# Altium PCB PCB1.PcbDoc
Units mm, origin at the board's own origin, x right, y up, seen from the top; angles counter-clockwise.
Board outline 125 x 72.5 mm, 2 copper layers (Top Layer, Bottom Layer), stack 1.571 mm thick; 55 components, 66 nets, 239 pads, 39 vias.
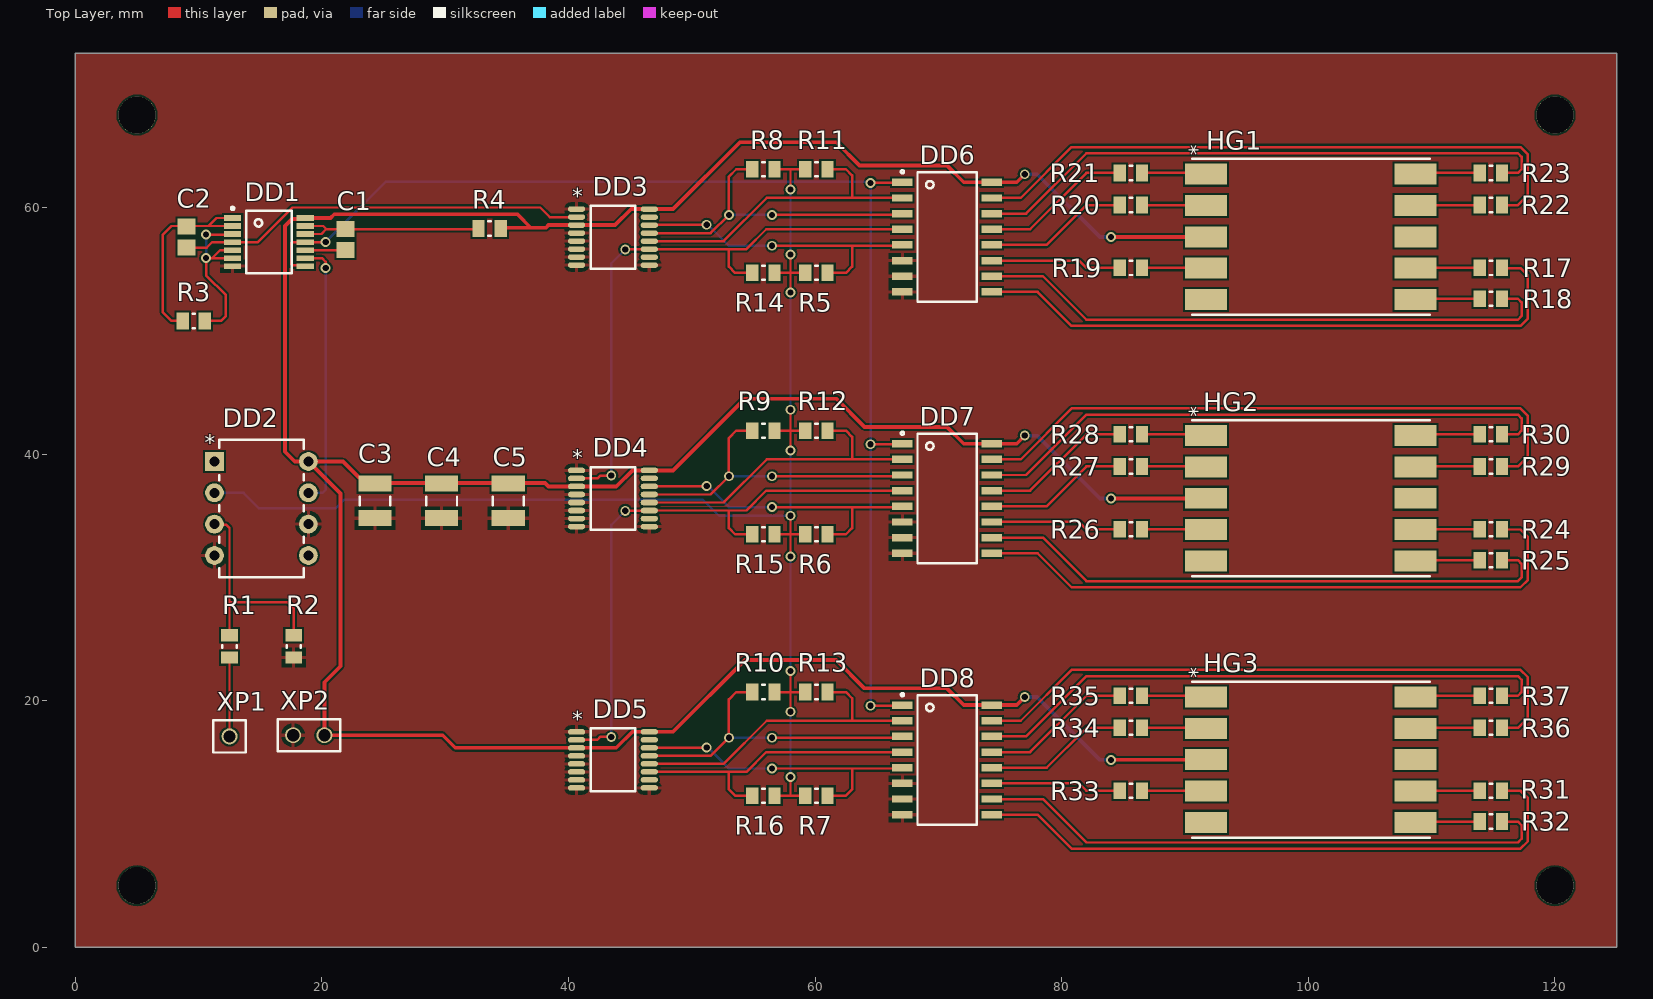
[diagram p0: Top Layer view]
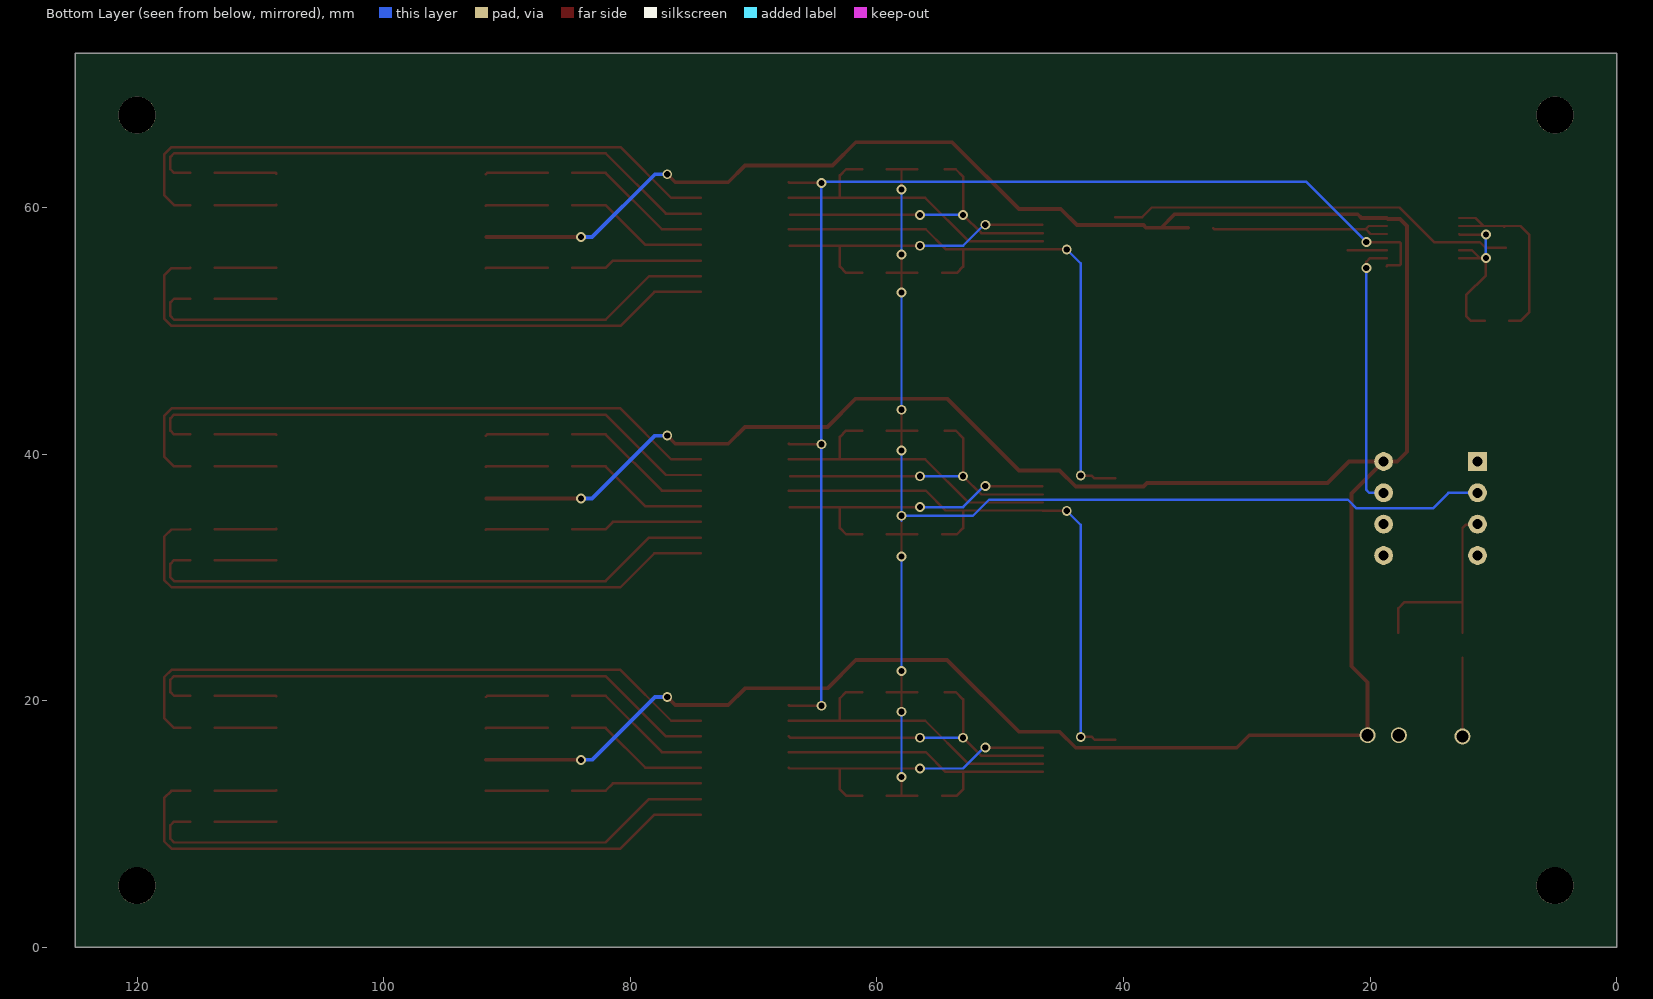
[diagram p1: Bottom Layer view, seen from below]
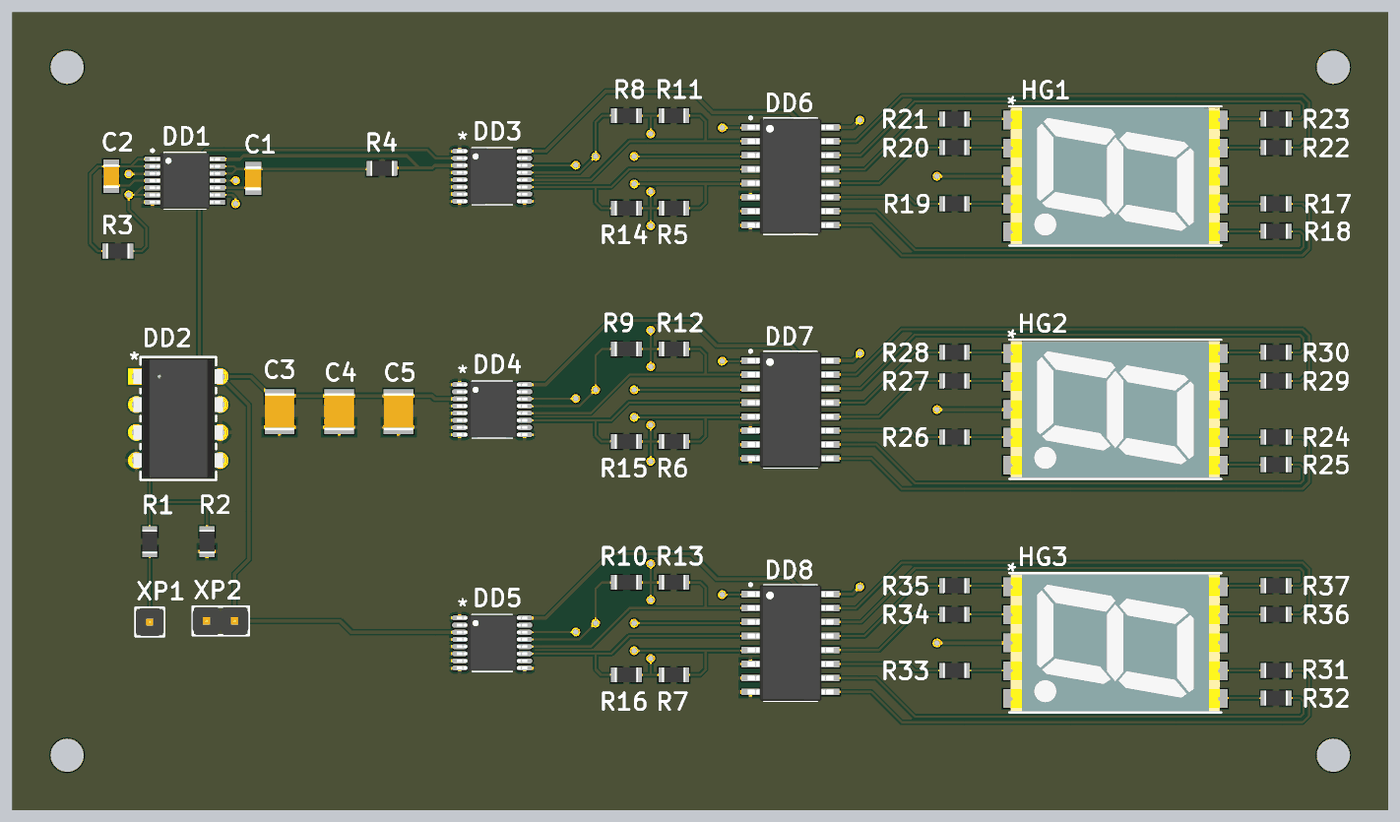
[diagram p2: 3D render of the assembled board from above, using the file's embedded part models]

## Layer stack, top to bottom
Top Solder: solder mask 0.0102, Solder Resist, Dk 3.5
Top Layer: signal copper 0.0356
Dielectric 1: dielectric 1.5, FR-4, Dk 4.8
Bottom Layer: signal copper 0.0356
Bottom Solder: solder mask 0.0102, Solder Resist, Dk 3.5

## Board outline
0,0 125,0 125,72.5 0,72.5

## Design rules (kind name [scope] priority, off if disabled: settings)
Clearance [All] p1: gap=0.15 ignorepadtopadclearanceinfootprint=FALSE
ComponentClearance [All] p1: gap=0.5 collisioncheckmode=3 verticalgap=0 showdistances=FALSE
HoleSize [All] p1: absolutevalues=TRUE maxlimit=3 minlimit=0.5 maxpercent=80.000 minpercent=20.000
MinimumSolderMaskSliver [All] p1: minsoldermaskwidth=0.1
PolygonConnect [All] p1: connectstyle=Relief reliefconductorwidth=0.3 reliefentries=4 polygonreliefangle="90 Angle" airgapwidth=0.3
RoutingVias [All] p1: holewidth=0.5 width=0.8 viastyle="Through Hole" minholewidth=0.4 minwidth=0.6 maxholewidth=0.6 maxwidth=1
SilkToSilkClearance [All] p1: silktosilkclearance=0.1
SilkToSolderMaskClearance [IsPad] p1: minsilkscreentomaskgap=0.1 clearancetoexposedcopper=TRUE
SolderMaskExpansion [All] p1: expansion=0.102 istentingtop=FALSE
Width Width_VCC_GND [InNetClass('VCC/GND')] p1: maxlimit=0.3 minlimit=0.3 preferedwidth=0.3
Width [All] p2: maxlimit=0.25 minlimit=0.15 preferedwidth=0.2
25 further rules are at their usual default settings.

## Classes and differential pairs
net class VCC/GND: GND NetC3_2

## Components (designator, comment, footprint, x,y, rotation, side; value= is the part's Value field where it differs from the comment)
C1 "C-0805 50 В 1,2 нФ 10% X7R KEMET" CAPC2012X09N 21.9,57.4 r90 top value="1,2 нФ"
C2 "C-0805 50 В 1,8 нФ 10% X7R Kemet" CAPC2012X09N 9,57.6 r270 top value="1,8 нФ"
C3 "C-1210 16 В 100 мкФ 20% X5R KEMET" CAPC3225X27N 24.3,36.2 r90 top value="100 мкФ"
C4 "C-1210 16 В 100 мкФ 20% X5R KEMET" CAPC3225X27N 29.7,36.2 r90 top value="100 мкФ"
C5 "C-1210 16 В 100 мкФ 20% X5R KEMET" CAPC3225X27N 35.1,36.2 r90 top value="100 мкФ"
DD1 "CD4001BPWR Texas Instruments" TSOP65P640X120-14N 15.7,57.2 r0 top
DD2 "LM311N STMicroelectronics" DIP-8_STM 11.28,39.4 r0 top
DD3 "TC-5971" TC5971 43.6,57.6 r0 top
DD4 "TC-5971" TC5971 43.6,36.4 r0 top
DD5 "TC-5971" TC5971 43.6,15.2 r0 top
DD6 "CD4511BNSR Texas Instruments" SOIC127P780X200-16N 70.7,57.6 r0 top
DD7 "CD4511BNSR Texas Instruments" SOIC127P780X200-16N 70.7,36.4 r0 top
DD8 "CD4511BNSR Texas Instruments" SOIC127P780X200-16N 70.7,15.2 r0 top
HG1 "ACSC56-41QBWA/D-F01 Kingbright" ACSX56-41 91.7,62.7 r270 top
HG2 "ACSC56-41QBWA/D-F01 Kingbright" ACSX56-41 91.7,41.5 r270 top
HG3 "ACSC56-41QBWA/D-F01 Kingbright" ACSX56-41 91.7,20.3 r270 top
R1 "0,125 Вт 10 кОм 5% Yageo" RESC2012X05N 12.5,23.5 r90 top value="10 кОм"
R2 "0,125 Вт 100 кОм 5% Yageo" RESC2012X05N 17.7,23.5 r90 top value="100 кОм"
R3 "0,125 Вт 360 кОм 5% Yageo" RESC2012X05N 8.7,50.8 r0 top value="360 кОм"
R4 "0,125 Вт 360 кОм 5% Yageo" RESC2012X05N 32.7,58.3 r0 top value="360 кОм"
R5 "0,125 Вт 36 кОм 5% Yageo" RESC2012X05N 59.2,54.7 r0 top value="36 кОм"
R6 "0,125 Вт 360 кОм 5% Yageo" RESC2012X05N 59.2,33.5 r0 top value="360 кОм"
R7 "0,125 Вт 3,6 МОм 5% Yageo" RESC2012X05N 59.2,12.3 r0 top value="3,6 МОм"
R8 "0,125 Вт 18 кОм 5% Yageo" RESC2012X05N 56.7,63.1 r180 top value="18 кОм"
R9 "0,125 Вт 180 кОм 5% Yageo" RESC2012X05N 56.7,41.9 r180 top value="180 кОм"
R10 "0,125 Вт 1,8 МОм 5% Yageo" RESC2012X05N 56.7,20.7 r180 top value="1,8 МОм"
R11 "0,125 Вт 9,1 кОм 5% Yageo" RESC2012X05N 59.2,63.1 r0 top value="9,1 кОм"
R12 "0,125 Вт 91 кОм 5% Yageo" RESC2012X05N 59.2,41.9 r0 top value="91 кОм"
R13 "0,125 Вт 910 кОм 5% Yageo" RESC2012X05N 59.2,20.7 r0 top value="910 кОм"
R14 "0,125 Вт 4,7 кОм 5% Yageo" RESC2012X05N 56.7,54.7 r180 top value="4,7 кОм"
R15 "0,125 Вт 47 кОм 5% Yageo" RESC2012X05N 56.7,33.5 r180 top value="47 кОм"
R16 "0,125 Вт 470 кОм 5% Yageo" RESC2012X05N 56.7,12.3 r180 top value="470 кОм"
R17 "0,125 Вт 470 кОм 5% Yageo" RESC2012X05N 115.7,55.1 r180 top value="470 кОм"
R18 "0,125 Вт 470 кОм 5% Yageo" RESC2012X05N 115.7,52.6 r180 top value="470 кОм"
R19 "0,125 Вт 470 кОм 5% Yageo" RESC2012X05N 84.7,55.1 r0 top value="470 кОм"
R20 "0,125 Вт 470 кОм 5% Yageo" RESC2012X05N 84.7,60.2 r0 top value="470 кОм"
R21 "0,125 Вт 470 кОм 5% Yageo" RESC2012X05N 84.7,62.8 r0 top value="470 кОм"
R22 "0,125 Вт 470 кОм 5% Yageo" RESC2012X05N 115.7,60.2 r180 top value="470 кОм"
R23 "0,125 Вт 470 кОм 5% Yageo" RESC2012X05N 115.7,62.8 r180 top value="470 кОм"
R24 "0,125 Вт 470 кОм 5% Yageo" RESC2012X05N 115.7,33.9 r180 top value="470 кОм"
R25 "0,125 Вт 470 кОм 5% Yageo" RESC2012X05N 115.7,31.4 r180 top value="470 кОм"
R26 "0,125 Вт 470 кОм 5% Yageo" RESC2012X05N 84.7,33.9 r0 top value="470 кОм"
R27 "0,125 Вт 470 кОм 5% Yageo" RESC2012X05N 84.7,39 r0 top value="470 кОм"
R28 "0,125 Вт 470 кОм 5% Yageo" RESC2012X05N 84.7,41.6 r0 top value="470 кОм"
R29 "0,125 Вт 470 кОм 5% Yageo" RESC2012X05N 115.7,39 r180 top value="470 кОм"
R30 "0,125 Вт 470 кОм 5% Yageo" RESC2012X05N 115.7,41.6 r180 top value="470 кОм"
R31 "0,125 Вт 470 кОм 5% Yageo" RESC2012X05N 115.7,12.7 r180 top value="470 кОм"
R32 "0,125 Вт 470 кОм 5% Yageo" RESC2012X05N 115.7,10.2 r180 top value="470 кОм"
R33 "0,125 Вт 470 кОм 5% Yageo" RESC2012X05N 84.7,12.7 r0 top value="470 кОм"
R34 "0,125 Вт 470 кОм 5% Yageo" RESC2012X05N 84.7,17.8 r0 top value="470 кОм"
R35 "0,125 Вт 470 кОм 5% Yageo" RESC2012X05N 84.7,20.4 r0 top value="470 кОм"
R36 "0,125 Вт 470 кОм 5% Yageo" RESC2012X05N 115.7,17.8 r180 top value="470 кОм"
R37 "0,125 Вт 470 кОм 5% Yageo" RESC2012X05N 115.7,20.4 r180 top value="470 кОм"
XP1 "61300111121 Würth Elektronik" PLS-1 12.5,17.1 r0 top
XP2 "61300211121 Würth Elektronik" PLS-2 20.2,17.2 r180 top

## Footprints (in the part's own frame and the unit in brackets; to place one, negate y for a bottom-side part, rotate by r counter-clockwise, add the part's x,y. Pads: shape width x height; smd on the part's side, far side on the other; paste and mask are expansions set on the pad)
ACSX56-41 [mm] "DISPLAY 7SEG 0.56\" SGL BLU 10SMD"
  rect 1.7x3.4 smd: 1(0,0) 2(2.54,0) 3(5.08,0) 4(7.62,0) 5(10.16,0) 6(10.16,17) 7(7.62,17) 8(5.08,17) 9(2.54,17) 10(0,17)
  silkscreen extent -1.25,-1.13 11.41,18.13, body extent -1.12,-1 11.28,18, height 3.75
CAPC2012X09N [mm] "Chip Capacitor, 2-Leads, Body 2.00x1.25mm, IPC Medium Density"
  rect 1.3x1.45 smd: 1(-0.85,0) 2(0.85,0)
  body extent -1.1,-0.72 1.1,0.72, height 0.88
CAPC3225X27N [mm] "Chip Capacitor, 2-Leads, Body 3.20x2.50mm, IPC Medium Density"
  rect 1.3x2.7 smd: 1(-1.4,0) 2(1.4,0)
  silkscreen extent -0.35,-1.25 0.35,1.25, body extent -1.7,-1.35 1.7,1.35, height 2.7
DIP-8_STM [mil]
  rect 60x60 hole 31.5 mask+0: 1(0,0)
  round 60 hole 31.5 mask+0: 2(0,-100) 3(0,-200) 4(0,-300) 5(300,-300) 6(300,-200) 7(300,-100) 8(300,0)
  silkscreen extent 15,-370 285,70, body extent -10,-365 310,65, height 205
PLS-1 [mm] "CONN HEADER VERT 1POS"
  round 1.3 hole 1: 1(0,0)
  silkscreen extent -1.3,-1.3 1.3,1.3, body extent -1.27,-1.27 1.27,1.27, height 8.54
PLS-2 [mm] "CONN HEADER VERT 2POS 2.54MM"
  round 1.3 hole 1: 1(0,0) 2(2.54,0)
  silkscreen extent -1.3,-1.3 3.8,1.3, body extent -1.27,-1.27 3.81,1.27, height 8.54
RESC2012X05N [mm] "Chip Resistor, 2-Leads, Body 2.00x1.25mm, IPC Medium Density"
  rect 1x1.35 smd: 1(0,0) 2(1.8,0)
  silkscreen extent 0.8,-0.58 1,0.58, body extent -0.15,-0.67 1.95,0.67, height 0.5
SOIC127P780X200-16N [mm] "SOIC, 16-Leads, Body 10.20x5.30mm, Pitch 1.27mm, IPC Medium Density"
  rect 1.65x0.6 smd: 1(-3.625,4.445) 2(-3.625,3.175) 3(-3.625,1.905) 4(-3.625,0.635) 5(-3.625,-0.635) 6(-3.625,-1.905) 7(-3.625,-3.175) 8(-3.625,-4.445) 9(3.625,-4.445) 10(3.625,-3.175) 11(3.625,-1.905) 12(3.625,-0.635) 13(3.625,0.635) 14(3.625,1.905) 15(3.625,3.175) 16(3.625,4.445)
  silkscreen extent -3.75,-5.25 2.4,5.42, body extent -3.9,-5.25 3.9,5.25, height 2
TC5971 [mm]
  oval 1.4x0.45 smd: 1(-2.95,2.275) 2(-2.95,1.625) 3(-2.95,0.975) 4(-2.95,0.325) 5(-2.95,-0.325) 6(-2.95,-0.975) 7(-2.95,-1.625) 8(-2.95,-2.275) 9(2.95,-2.275) 10(2.95,-1.625) 11(2.95,-0.975) 12(2.95,-0.325) 13(2.95,0.325) 14(2.95,0.975) 15(2.95,1.625) 16(2.95,2.275)
  silkscreen extent -1.8,-2.55 1.8,2.55, body extent -3.2,-2.55 3.2,2.55, height 1.2
TSOP65P640X120-14N [mm] "TSOP, 14-Leads, Body 5.00x4.40mm, Pitch 0.65mm, IPC Medium Density"
  rect 1.4x0.45 smd: 1(-2.95,1.95) 2(-2.95,1.3) 3(-2.95,0.65) 4(-2.95,0) 5(-2.95,-0.65) 6(-2.95,-1.3) 7(-2.95,-1.95) 8(2.95,-1.95) 9(2.95,-1.3) 10(2.95,-0.65) 11(2.95,0) 12(2.95,0.65) 13(2.95,1.3) 14(2.95,1.95)
  silkscreen extent -3.07,-2.55 1.85,2.85, body extent -3.2,-2.55 3.2,2.55, height 1.2

## Part data
C1: library part C0805C122K5RAC7800, "CAP CER 1200PF 50V X7R 0805", Manufacturer=KEMET, Package=C-0805, Temp_Coef=X7R, Tolerance=10%, Voltage="50 В"
C2: library part C0805C182K5RAC7800, "CAP CER 1800PF 50V X7R 0805", Manufacturer=KEMET, Package=C-0805, Temp_Coef=X7R, Tolerance=10%, Voltage="50 В"
C3 C4 C5: library part C1210C107M4PAC7800, "CAP CER 100UF 16V X5R 1210", Manufacturer=KEMET, Package=C-1210, Temp_Coef=X5R, Tolerance=20%, Voltage="16 В"
DD1: library part CD4001BPWR, "IC GATE NOR 4CH 2-INP 14TSSOP", Manufacturer="Texas Instruments", Name=CD4001BPWR
DD2: library part LM311N, "IC VOLTAGE COMPARATOR 8-DIP", Manufacturer=STMicroelectronics, Name=LM311N
DD3 DD4 DD5: "IC COUNTER BINARY/DECADE", Name=TC-5971
DD6 DD7 DD8: library part CD4511BNSR, "IC DRVR 7 SEGMENT 16SO", Manufacturer="Texas Instruments", Name=CD4511BNSR
HG1 HG2 HG3: library part ACSC56-41QBWA/D-F01, "DISPLAY 7SEG 0.56\" SGL BLU 10SMD", Manufacturer=Kingbright, Name=ACSC56-41QBWA/D-F01
R1: library part RC0805JR-0710KL, "RES 10K OHM 5% 1/8W 0805", Manufacturer=YAGEO, Packages=R-0805, Power="0,125 Вт", Tolerance=5%
R2: library part RC0805JR-07100KL, "RES 100K OHM 5% 1/8W 0805", Manufacturer=YAGEO, Packages=R-0805, Power="0,125 Вт", Tolerance=5%
R3 R4 R6: library part RC0805JR-07360KL, "RES 360K OHM 5% 1/8W 0805", Manufacturer=YAGEO, Packages=R-0805, Power="0,125 Вт", Tolerance=5%
R5: library part RC0805JR-0736KL, "RES 36K OHM 5% 1/8W 0805", Manufacturer=YAGEO, Packages=R-0805, Power="0,125 Вт", Tolerance=5%
R7: library part RC0805JR-073M6L, "RES 3.6M OHM 5% 1/8W 0805", Manufacturer=YAGEO, Packages=R-0805, Power="0,125 Вт", Tolerance=5%
R8: library part RC0805JR-0718KL, "RES 18K OHM 5% 1/8W 0805", Manufacturer=YAGEO, Packages=R-0805, Power="0,125 Вт", Tolerance=5%
R9: library part RC0805JR-07180KL, "RES 180K OHM 5% 1/8W 0805", Manufacturer=YAGEO, Packages=R-0805, Power="0,125 Вт", Tolerance=5%
R10: library part RC0805JR-071M8L, "RES 1.8M OHM 5% 1/8W 0805", Manufacturer=YAGEO, Packages=R-0805, Power="0,125 Вт", Tolerance=5%
R11: library part RC0805JR-079K1L, "RES 9.1K OHM 5% 1/8W 0805", Manufacturer=YAGEO, Packages=R-0805, Power="0,125 Вт", Tolerance=5%
R12: library part RC0805JR-0791KL, "RES 91K OHM 5% 1/8W 0805", Manufacturer=YAGEO, Packages=R-0805, Power="0,125 Вт", Tolerance=5%
R13: library part RC0805JR-07910KL, "RES 910K OHM 5% 1/8W 0805", Manufacturer=YAGEO, Packages=R-0805, Power="0,125 Вт", Tolerance=5%
R14: library part RC0805JR-074K7L, "RES 4.7K OHM 5% 1/8W 0805", Manufacturer=YAGEO, Packages=R-0805, Power="0,125 Вт", Tolerance=5%
R15: library part RC0805JR-0747KL, "RES 47K OHM 5% 1/8W 0805", Manufacturer=YAGEO, Packages=R-0805, Power="0,125 Вт", Tolerance=5%
R16 R17 R18 R19 R20 R21 R22 R23 R24 R25 R26 R27 R28 R29 R30 R31 R32 R33 R34 R35 R36 R37: library part RC0805JR-07470KL, "RES 470K OHM 5% 1/8W 0805", Manufacturer=YAGEO, Packages=R-0805, Power="0,125 Вт", Tolerance=5%
XP1: library part 61300111121, "CONN HEADER VERT 1POS", Manufacturer="Würth Elektronik", Name=61300111121
XP2: library part 61300211121, "CONN HEADER VERT 2POS 2.54MM", Manufacturer="Würth Elektronik", Name=61300211121

## Free pads (board coordinates)
  round 3 hole 3: GND(5,5) GND(5,67.5) GND(120,5) GND(120,67.5)

## Via types
v1: diameter 0.8, hole 0.5, Top Layer to Bottom Layer, 39 vias

## Nets (pads, with @x,y where several pads share a name; then routed paths per layer and width w, separated by ;. In a path a pad name is that pad's centre, name@x,y a point inside that pad or via, vN(x,y) a via of type N, cw(c..) or ccw(c..) an arc to the next point about the centre after c; other vN are vias at no path point)
GND: C3.1 C4.1 C5.1 DD1.7 DD2.4 DD2.6 DD3.1 DD3.4 DD3.5 DD3.6 DD3.7 DD3.8 DD3.9 DD4.1 DD4.4 DD4.5 DD4.6 DD4.7 DD4.8 DD4.9 DD5.1 DD5.4 DD5.5 DD5.6 DD5.7 DD5.8 DD5.9 DD6.6 DD6.7 DD6.8 DD7.6 DD7.7 DD7.8 DD8.6 DD8.7 DD8.8 R2.1 XP2.2
NetC1_1: C1.1 DD1.10 | length 3.2
  Top Layer w0.2: DD1.10@18.638,56.55 C1.1@21.8,56.55
NetC1_2: C1.2 DD1.12 DD1.13 R4.1 | length 16.1
  Top Layer w0.2: DD1.12@18.638,57.85 19.95,57.85 20.35,58.25 ; DD1.13@18.638,58.5 20,58.5 20.1,58.5 20.35,58.25 ; R4.1 32.65,58.25 C1.2 20.35,58.25
NetC2_1: C2.1 DD1.1 DD1.2 R3.1 | length 16.4
  Top Layer w0.2: R3.1 7.8,50.8 7.1,51.5 7.1,57.8 7.8,58.5 9.05,58.5 9.1,58.45 9.15,58.5 10.8,58.5 ; DD1.2@12.762,58.5 10.8,58.5 ; DD1.1@12.762,59.15 11.45,59.15 10.8,58.5
NetC2_2: C2.2 DD1.4 DD3.2 | length 33.3
  Top Layer w0.2: C2.2 10.65,56.75 11.1,57.2 12.762,57.2 14.8,57.2 17.6,60 37.7,60 38.475,59.225 DD3.2
NetC3_2: C3.2 C4.2 C5.2 DD1.14 DD2.8 DD3.3 DD3.16 DD4.3 DD4.16 DD5.3 DD5.16 DD6.16 DD7.16 DD8.16 HG1.3 HG2.3 HG3.3 R4.2 XP2.1 | length 287.9
  Top Layer w0.3: R4.2@34.763,58.363 36.937,58.363 ; v1(77,20.3) 76.345,19.645 74.262,19.645 72.055,19.645 70.7,21 64,21 61.7,23.3 54.3,23.3 48.475,17.475 DD5.16 45.175,17.475 43.875,16.175 DD5.3 30.815,16.175 29.79,17.2 XP2.1 20.2,21.5 21.5,22.8 21.5,36.8 DD2.8 ; v1(77,41.5) 76.345,40.845 74.262,40.845 72.055,40.845 70.7,42.2 64,42.2 61.7,44.5 54.3,44.5 48.475,38.675 DD4.16 45.175,38.675 43.875,37.375 DD4.3 38.367,37.375 38.092,37.65 35.1,37.65 29.7,37.65 24.3,37.65 23.45,37.65 21.7,39.4 DD2.8 ; v1(77,62.7) 76.345,62.045 74.262,62.045 72.055,62.045 70.7,63.4 63.6,63.4 61.7,65.3 53.9,65.3 48.475,59.875 DD3.16 45.075,59.875 43.775,58.575 DD3.3 38.375,58.575 38.163,58.363 36.937,58.363 ; v1(84,15.2) 91.68,15.2 HG3.3 ; v1(84,36.4) HG2.3@91.68,36.4 ; v1(84,57.6) HG1.3@91.68,57.6 ; DD2.8 17.8,39.4 17,40.2 17,58.5 17.575,59.075 18.563,59.075 18.638,59.15 20.701,59.15 21.001,59.45 35.85,59.45 36.937,58.363
  Bottom Layer w0.3: v1(77,20.3) 78,20.3 83.1,15.2 v1(84,15.2) ; v1(77,41.5) 78,41.5 83.1,36.4 v1(84,36.4) ; v1(77,62.7) 78,62.7 83.1,57.6 v1(84,57.6)
NetDD1_3: DD1.3 DD1.5 DD1.6 R3.2 | length 15.3
  Top Layer w0.2: v1(10.6,57.8) 12.712,57.8 DD1.3@12.762,57.85 ; R3.2@10.7,50.8 11.8,50.8 12.2,51.2 12.2,52.9 10.6,54.5 v1(10.6,55.9) 11.1,55.9 ; DD1.6@12.762,55.9 11.1,55.9 ; DD1.5@12.762,56.55 11.75,56.55 11.1,55.9
  Bottom Layer w0.2: v1@10.6,55.8 v1(10.6,55.9) v1(10.6,57.8)
NetDD1_8: DD1.8 DD1.11 DD6.1 DD7.1 DD8.1 | length 102.4
  Top Layer w0.2: DD1.8@18.638,55.25 18.588,55.3 17.617,55.3 17.5,55.417 17.5,57.083 17.617,57.2 18.638,57.2 v1(20.3,57.2) ; v1(64.5,19.595) 67.088,19.595 DD8.1@67.138,19.645 ; v1(64.5,40.8) 67.093,40.8 DD7.1@67.138,40.845 ; v1(64.5,62) 67.093,62 DD6.1@67.138,62.045
  Bottom Layer w0.2: v1(20.3,57.2) 25.2,62.1 64.4,62.1 v1(64.5,62) v1(64.5,40.8) 64.5,19.6 v1(64.5,19.595)
NetDD1_9: DD1.9 DD2.7 | length 21.8
  Top Layer w0.2: DD1.9@18.638,55.9 20,55.9 20.3,55.6 v1(20.3,55.1)
  Bottom Layer w0.2: DD2.7 20.06,36.86 20.3,37.1 v1(20.3,55.1)
NetDD2_2: DD2.2 R5.1 R6.1 R7.1 R8.1 R9.1 R10.1 R11.1 R12.1 R13.1 R14.1 R15.1 R16.1 | length 113.9
  Top Layer w0.2: R16.1 58,12.3 ; R10.1 58,20.7 ; R15.1 58,33.5 ; R9.1 58,41.9 ; R14.1 58,54.7 ; R8.1 58,63.1 ; v1(58,13.8) 58,12.3 ; v1(58,19.1) 58,20.7 ; v1(58,22.4) 58,20.7 ; v1(58,31.7) 58,33.5 ; v1(58,35) 58,33.5 ; v1(58,40.3) 58,41.9 ; v1(58,43.6) 58,41.9 ; v1(58,53.1) 58,54.7 ; v1(58,56.2) 58,54.7 ; v1(58,61.45) 58,61.5 58,63.1 ; R7.1 58,12.3 ; R13.1 58,20.7 ; R6.1 58,33.5 ; R12.1 58,41.9 ; R5.1 58,54.7 ; R11.1 58,63.1
  Bottom Layer w0.2: DD2.2 13.64,36.86 14.9,35.6 21.1,35.6 21.8,36.3 50.9,36.3 52.2,35 v1(58,35) v1(58,40.3) ; v1(58,13.8) v1(58,19.1) ; v1(58,22.4) v1(58,31.7) ; v1(58,43.6) v1(58,53.1) ; v1(58,56.2) v1(58,61.45)
NetDD2_3: DD2.3 R1.2 R2.2 | length 17.3
  Top Layer w0.2: DD2.3 11.325,34.275 12.225,34.275 12.5,34 12.5,28 ; R1.2@12.5,25.5 12.5,28 ; R2.2@17.7,25.5 17.7,27.5 17.2,28 12.5,28
NetDD3_11: DD3.11 DD4.2 DD6.4 R14.2 | length 48.3
  Top Layer w0.2: DD4.2 42.361,38.025 42.599,38.262 v1(43.462,38.262) ; v1(44.6,56.6) 46.525,56.6 DD3.11 53,56.625 ; R14.2@54.7,54.7 53.5,54.7 53,55.2 53,56.625 ; DD6.4@67.138,58.235 56.035,58.235 54.425,56.625 53,56.625
  Bottom Layer w0.2: v1(43.462,38.262) 43.462,55.462 v1(44.6,56.6)
NetDD3_12: DD3.12 DD6.2 R11.2 | length 25.9
  Top Layer w0.2: DD3.12 52.575,57.275 56.075,60.775 63,60.775 ; R11.2@61.2,63.1 62.5,63.1 63,62.6 63,60.775 ; DD6.2@67.138,60.775 63,60.775
NetDD3_13: DD3.13 DD6.3 R8.2 | length 25.9
  Top Layer w0.2: DD3.13 51.525,57.925 v1(53,59.4) 53,62.5 53.6,63.1 R8.2@54.5,63.1 ; v1(56.5,59.4) DD6.3@67.033,59.4
  Bottom Layer w0.2: v1(53,59.4) v1(56.5,59.4)
NetDD3_14: DD3.14 DD6.5 R5.2 | length 25
  Top Layer w0.2: DD3.14@46.563,58.588 v1@51.287,58.588 ; v1(56.5,56.9) 63,56.9 ; R5.2@61.2,54.7 62.5,54.7 63,55.2 63,56.9 ; DD6.5@67.073,56.9 63,56.9 ; v1@51.287,58.588 51.3,58.6 51.3,58.588 v1@51.287,58.588
  Bottom Layer w0.2: v1@51.3,58.6 53,56.9 v1(56.5,56.9)
  other v1: 51.2,58.6
NetDD4_11: DD4.11 DD5.2 DD7.4 R15.2 | length 48.2
  Top Layer w0.2: DD5.2 42.325,16.825 42.562,17.062 v1(43.462,17.062) ; v1(44.6,35.4) DD4.11@46.525,35.4 ; DD4.11 53,35.425 ; R15.2@54.7,33.5 53.5,33.5 53,34 53,35.425 ; DD7.4@67.138,37.035 56.035,37.035 54.425,35.425 53,35.425
  Bottom Layer w0.2: v1(43.462,17.062) 43.462,34.262 v1(44.6,35.4)
NetDD4_12: DD4.12 DD7.2 R12.2 | length 25.9
  Top Layer w0.2: DD4.12 52.575,36.075 56.075,39.575 63,39.575 ; R12.2@61.2,41.9 62.5,41.9 63,41.4 63,39.575 ; DD7.2@67.138,39.575 63,39.575
NetDD4_13: DD4.13 DD7.3 R9.2 | length 25.9
  Top Layer w0.2: DD4.13 51.525,36.725 v1(53,38.2) 53,41.3 53.6,41.9 R9.2@54.5,41.9 ; v1(56.5,38.2) DD7.3@67.033,38.2
  Bottom Layer w0.2: v1(53,38.2) v1(56.5,38.2)
NetDD4_14: DD4.14 DD7.5 R6.2 | length 24.9
  Top Layer w0.2: DD4.14@46.563,37.388 51.278,37.388 v1@51.3,37.41 ; v1(56.5,35.7) 63,35.7 ; R6.2@61.2,33.5 62.5,33.5 63,34 63,35.7 ; DD7.5@67.073,35.7 63,35.7
  Bottom Layer w0.2: v1@51.3,37.4 53,35.7 v1(56.5,35.7)
  other v1: 51.2,37.41
NetDD5_11: DD5.11 DD8.4 R16.2 | length 24.6
  Top Layer w0.2: DD5.11 53,14.225 ; R16.2@54.7,12.3 53.5,12.3 53,12.8 53,14.225 ; DD8.4@67.138,15.835 56.035,15.835 54.425,14.225 53,14.225
NetDD5_12: DD5.12 DD8.2 R13.2 | length 25.9
  Top Layer w0.2: DD5.12 52.575,14.875 56.075,18.375 63,18.375 ; R13.2@61.2,20.7 62.5,20.7 63,20.2 63,18.375 ; DD8.2@67.138,18.375 63,18.375
NetDD5_13: DD5.13 DD8.3 R10.2 | length 26.1
  Top Layer w0.2: DD5.13 51.525,15.525 v1(53,17) 53,20.1 53.6,20.7 R10.2@54.5,20.7 ; v1(56.5,17) 67.033,17 DD8.3@67.138,17.105
  Bottom Layer w0.2: v1(53,17) v1(56.5,17)
NetDD5_14: DD5.14 DD8.5 R7.2 | length 25.1
  Top Layer w0.2: DD5.14 46.563,16.187 v1@51.287,16.187 ; v1(56.5,14.5) 63,14.5 ; R7.2@61.2,12.3 62.5,12.3 63,12.8 63,14.5 ; DD8.5@67.138,14.565 67.073,14.5 63,14.5 ; v1@51.287,16.187 51.3,16.2 51.3,16.187 v1@51.287,16.187
  Bottom Layer w0.2: v1@51.3,16.2 53,14.5 v1(56.5,14.5)
  other v1: 51.2,16.2
NetDD6_9: DD6.9 R17.1 | length 50.8
  Top Layer w0.2: DD6.9@74.262,53.155 78.045,53.155 80.8,50.4 117.2,50.4 117.8,51 117.8,54.5 117.215,55.085 115.715,55.085 R17.1
NetDD6_10: DD6.10 R18.1 | length 47.4
  Top Layer w0.2: DD6.10@74.262,54.425 78.475,54.425 82,50.9 117,50.9 117.3,51.2 117.3,52.3 117,52.6 R18.1
NetDD6_11: DD6.11 R19.1 | length 10.7
  Top Layer w0.2: DD6.11@74.262,55.695 81.405,55.695 82,55.1 R19.1
NetDD6_12: DD6.12 R20.1 | length 11.8
  Top Layer w0.2: DD6.12@74.262,56.965 78.765,56.965 82,60.2 R20.1
NetDD6_13: DD6.13 R21.1 | length 12.3
  Top Layer w0.2: DD6.13@74.262,58.235 77.435,58.235 82,62.8 R21.1
NetDD6_14: DD6.14 R23.1 | length 47.9
  Top Layer w0.2: DD6.14@74.262,59.505 77.105,59.505 82,64.4 117,64.4 117.3,64.1 117.3,63.1 117,62.8 R23.1
NetDD6_15: DD6.15 R22.1 | length 51.2
  Top Layer w0.2: DD6.15@74.262,60.775 76.675,60.775 80.8,64.9 117.2,64.9 117.8,64.3 117.8,61 117,60.2 R22.1
NetDD7_9: DD7.9 R24.1 | length 50.8
  Top Layer w0.2: DD7.9@74.262,31.955 78.045,31.955 80.8,29.2 117.2,29.2 117.8,29.8 117.8,33.3 117.215,33.885 115.715,33.885 R24.1
NetDD7_10: DD7.10 R25.1 | length 47.4
  Top Layer w0.2: DD7.10@74.262,33.225 78.475,33.225 82,29.7 117,29.7 117.3,30 117.3,31.1 117,31.4 R25.1
NetDD7_11: DD7.11 R26.1 | length 10.7
  Top Layer w0.2: DD7.11@74.262,34.495 81.405,34.495 82,33.9 R26.1
NetDD7_12: DD7.12 R27.1 | length 11.8
  Top Layer w0.2: DD7.12@74.262,35.765 78.765,35.765 82,39 R27.1
NetDD7_13: DD7.13 R28.1 | length 12.3
  Top Layer w0.2: DD7.13@74.262,37.035 77.435,37.035 82,41.6 R28.1
NetDD7_14: DD7.14 R30.1 | length 47.9
  Top Layer w0.2: DD7.14@74.262,38.305 77.105,38.305 82,43.2 117,43.2 117.3,42.9 117.3,41.9 117,41.6 R30.1
NetDD7_15: DD7.15 R29.1 | length 51.2
  Top Layer w0.2: DD7.15@74.262,39.575 76.675,39.575 80.8,43.7 117.2,43.7 117.8,43.1 117.8,39.8 117,39 R29.1
NetDD8_9: DD8.9 R31.1 | length 50.8
  Top Layer w0.2: DD8.9@74.262,10.755 78.045,10.755 80.8,8 117.2,8 117.8,8.6 117.8,12.1 117.215,12.685 115.715,12.685 R31.1
NetDD8_10: DD8.10 R32.1 | length 47.4
  Top Layer w0.2: DD8.10@74.262,12.025 78.475,12.025 82,8.5 117,8.5 117.3,8.8 117.3,9.9 117,10.2 R32.1
NetDD8_11: DD8.11 R33.1 | length 10.7
  Top Layer w0.2: DD8.11@74.262,13.295 81.405,13.295 82,12.7 R33.1
NetDD8_12: DD8.12 R34.1 | length 11.8
  Top Layer w0.2: DD8.12@74.262,14.565 78.765,14.565 82,17.8 R34.1
NetDD8_13: DD8.13 R35.1 | length 12.3
  Top Layer w0.2: DD8.13@74.262,15.835 77.435,15.835 82,20.4 R35.1
NetDD8_14: DD8.14 R37.1 | length 47.9
  Top Layer w0.2: DD8.14@74.262,17.105 77.105,17.105 82,22 117,22 117.3,21.7 117.3,20.7 117,20.4 R37.1
NetDD8_15: DD8.15 R36.1 | length 51.2
  Top Layer w0.2: DD8.15@74.262,18.375 76.675,18.375 80.8,22.5 117.2,22.5 117.8,21.9 117.8,18.6 117,17.8 R36.1
NetHG1_1: HG1.1 R21.2 | length 5
  Top Layer w0.2: R21.2@86.7,62.8 91.6,62.8 HG1.1
NetHG1_2: HG1.2 R20.2 | length 5
  Top Layer w0.2: R20.2@86.7,60.2 91.66,60.2 HG1.2
NetHG1_4: HG1.4 R19.2 | length 5
  Top Layer w0.2: R19.2@86.7,55.1 91.68,55.1 HG1.4
NetHG1_6: HG1.6 R18.2 | length 5
  Top Layer w0.2: HG1.6@108.7,52.59 108.71,52.6 R18.2@113.7,52.6
NetHG1_7: HG1.7 R17.2 | length 5
  Top Layer w0.2: HG1.7@108.7,55.13 108.73,55.1 R17.2@113.7,55.1
NetHG1_9: HG1.9 R22.2 | length 5
  Top Layer w0.2: HG1.9@108.7,60.21 108.71,60.2 R22.2@113.7,60.2
NetHG1_10: HG1.10 R23.2 | length 5
  Top Layer w0.2: HG1.10@108.7,62.75 108.75,62.8 R23.2@113.7,62.8
NetHG2_1: HG2.1 R28.2 | length 5
  Top Layer w0.2: R28.2@86.7,41.6 91.6,41.6 HG2.1
NetHG2_2: HG2.2 R27.2 | length 5
  Top Layer w0.2: R27.2@86.7,39 91.66,39 HG2.2
NetHG2_4: HG2.4 R26.2 | length 5
  Top Layer w0.2: R26.2@86.7,33.9 91.68,33.9 HG2.4
NetHG2_6: HG2.6 R25.2 | length 5
  Top Layer w0.2: HG2.6@108.7,31.39 108.71,31.4 R25.2@113.7,31.4
NetHG2_7: HG2.7 R24.2 | length 5
  Top Layer w0.2: HG2.7@108.7,33.93 108.73,33.9 R24.2@113.7,33.9
NetHG2_9: HG2.9 R29.2 | length 5
  Top Layer w0.2: HG2.9@108.7,39.01 108.71,39 R29.2@113.7,39
NetHG2_10: HG2.10 R30.2 | length 5
  Top Layer w0.2: HG2.10@108.7,41.55 108.75,41.6 R30.2@113.7,41.6
NetHG3_1: HG3.1 R35.2 | length 5
  Top Layer w0.2: R35.2@86.7,20.4 91.6,20.4 HG3.1
NetHG3_2: HG3.2 R34.2 | length 5
  Top Layer w0.2: R34.2@86.7,17.8 91.66,17.8 HG3.2
NetHG3_4: HG3.4 R33.2 | length 5
  Top Layer w0.2: R33.2@86.7,12.7 91.68,12.7 HG3.4
NetHG3_6: HG3.6 R32.2 | length 5
  Top Layer w0.2: HG3.6@108.7,10.19 108.71,10.2 R32.2@113.7,10.2
NetHG3_7: HG3.7 R31.2 | length 5
  Top Layer w0.2: HG3.7@108.7,12.73 108.73,12.7 R31.2@113.7,12.7
NetHG3_9: HG3.9 R36.2 | length 5
  Top Layer w0.2: HG3.9@108.7,17.81 108.71,17.8 R36.2@113.7,17.8
NetHG3_10: HG3.10 R37.2 | length 5
  Top Layer w0.2: HG3.10@108.7,20.35 108.75,20.4 R37.2@113.7,20.4
NetR1_1: R1.1 XP1.1 | length 6.4
  Top Layer w0.2: XP1.1 R1.1
pads on no net: DD2.1 DD2.5 DD3.10 DD3.15 DD4.10 DD4.15 DD5.10 DD5.15 HG1.5 HG1.8 HG2.5 HG2.8 HG3.5 HG3.8

## Polygon pours and split planes (outlines as drawn)
GND on Top Layer "GND_L01_P000" (solid, remove dead copper, pour order 0): 0,72.5 125,72.5 125,0 0,0

## Silkscreen, mask and mechanical layers (free items; w line width, h text height)
Mechanical 1:
  the board outline again, w0.254
Drill Drawing:
  circle w0.254: c151.829,29.711 r1.859
  circle w0.254: c151.829,21.347 r1.859
  circle w0.254: c151.829,12.982 r1.859
  circle w0.254: c151.829,4.618 r1.859
  lines w0.5: 138.25,33.707 242.275,33.707 ; 164.598,0.25 164.598,42.071 ; 186.539,0.25 186.539,42.071 ; 214.029,0.25 214.029,42.071 ; 138.25,0.25 242.275,0.25 242.275,42.071 138.25,42.071 138.25,0.25
  text "??????????" at 143.269,36.216 h4.8
  text "?????????" at 167.107,36.216 h4.8
  text "??????" at 189.048,36.216 h4.8
  text "???????????" at 216.538,36.216 h4.8
  text "4" at 174.911,27.852 h4
  text "3.00mm (118.11mil)" at 189.048,27.852 h4
  text "PTH" at 224.154,27.852 h4
  text "3" at 174.708,19.488 h4
  text "1.00mm (39.37mil)" at 189.421,19.488 h4
  text "PTH" at 224.154,19.488 h4
  text "8" at 174.678,11.124 h4
  text "0.80mm (31.50mil)" at 189.21,11.124 h4
  text "PTH" at 224.154,11.124 h4
  text "39" at 173.819,2.759 h4
  text "0.50mm (19.69mil)" at 189.116,2.759 h4
  text "PTH" at 224.154,2.759 h4

## Text inside footprints (layer, text, board x,y; h text height)
DD2: Top Overlay "*" at 10.48,40.3 h1.27; Top Assembly "*" at 11.724,38.765 h1.27
DD3: Top Overlay "*" at 40.3,60.3 h1.27
DD4: Top Overlay "*" at 40.3,39.1 h1.27
DD5: Top Overlay "*" at 40.3,17.9 h1.27
HG1: Top Overlay "*" at 89.8,65.1 h1.27 r270
HG2: Top Overlay "*" at 89.8,43.9 h1.27 r270
HG3: Top Overlay "*" at 89.8,22.7 h1.27 r270